# EAGLE board Qwiic_RF-Panel (EAGLE 7.7.0), part 1 of 2
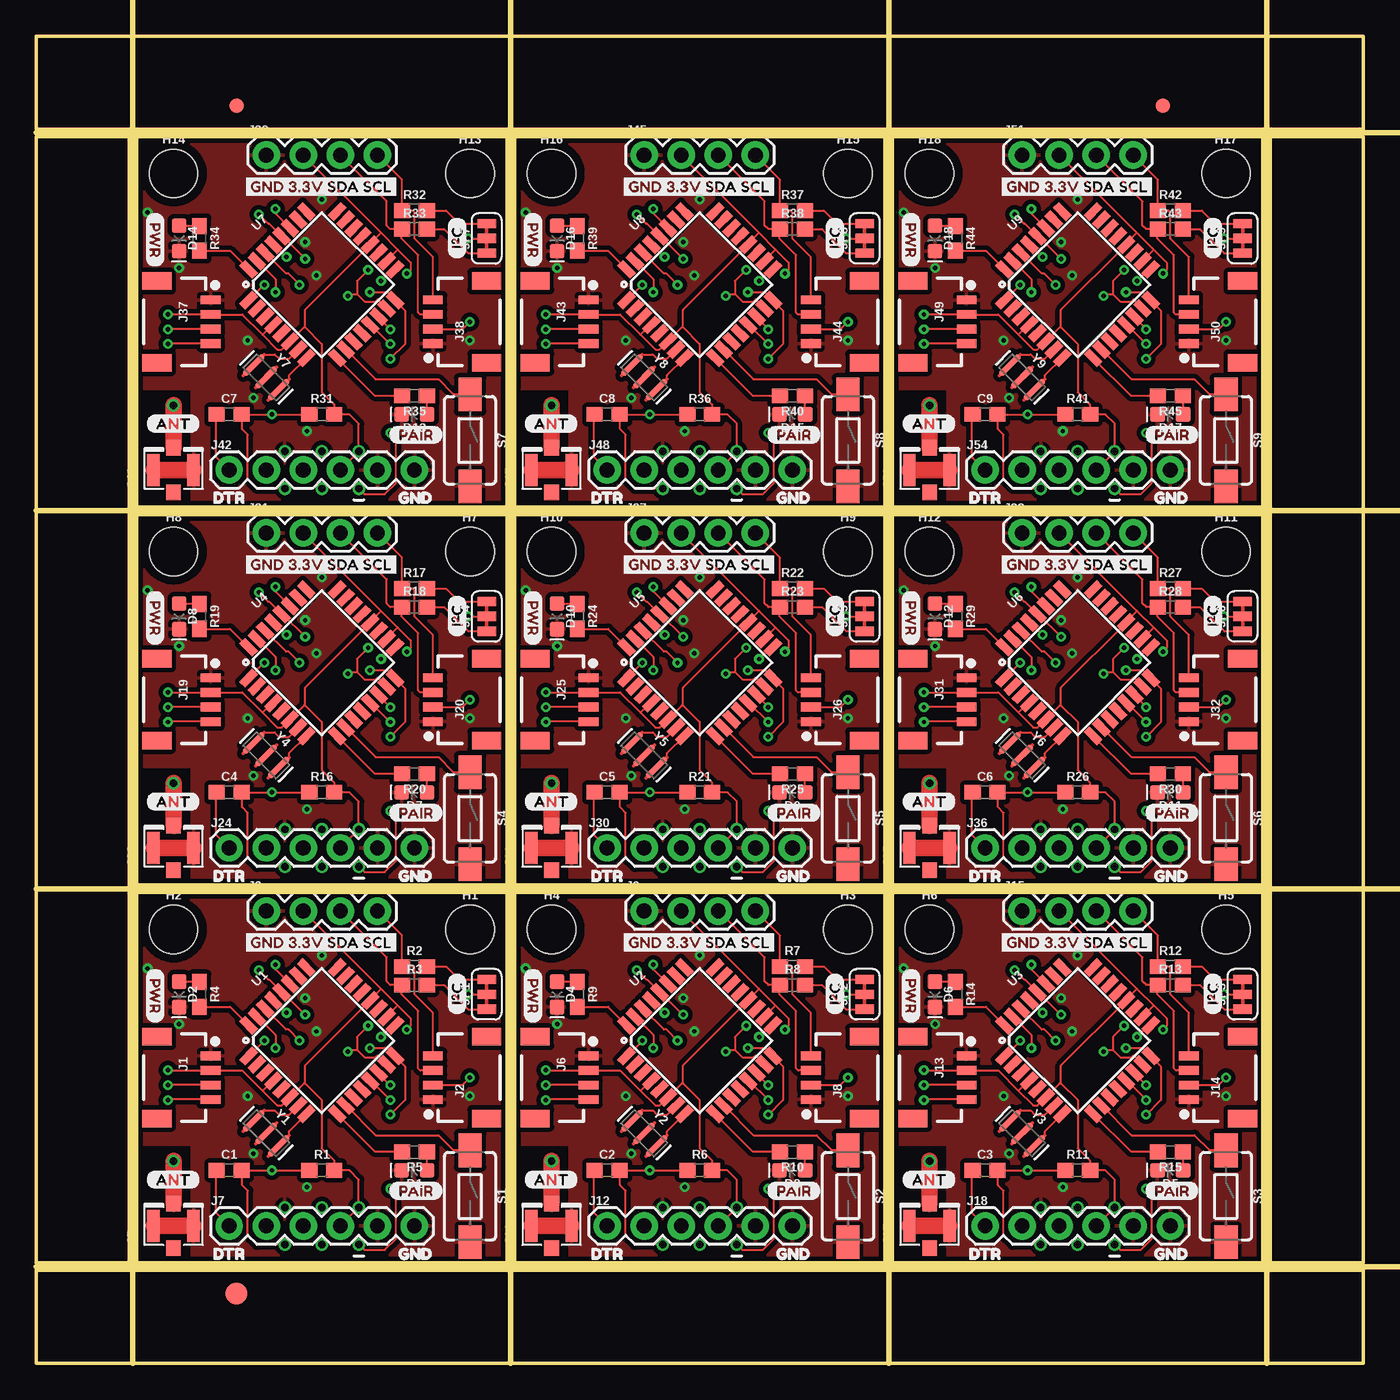
[diagram p0: board, top side]
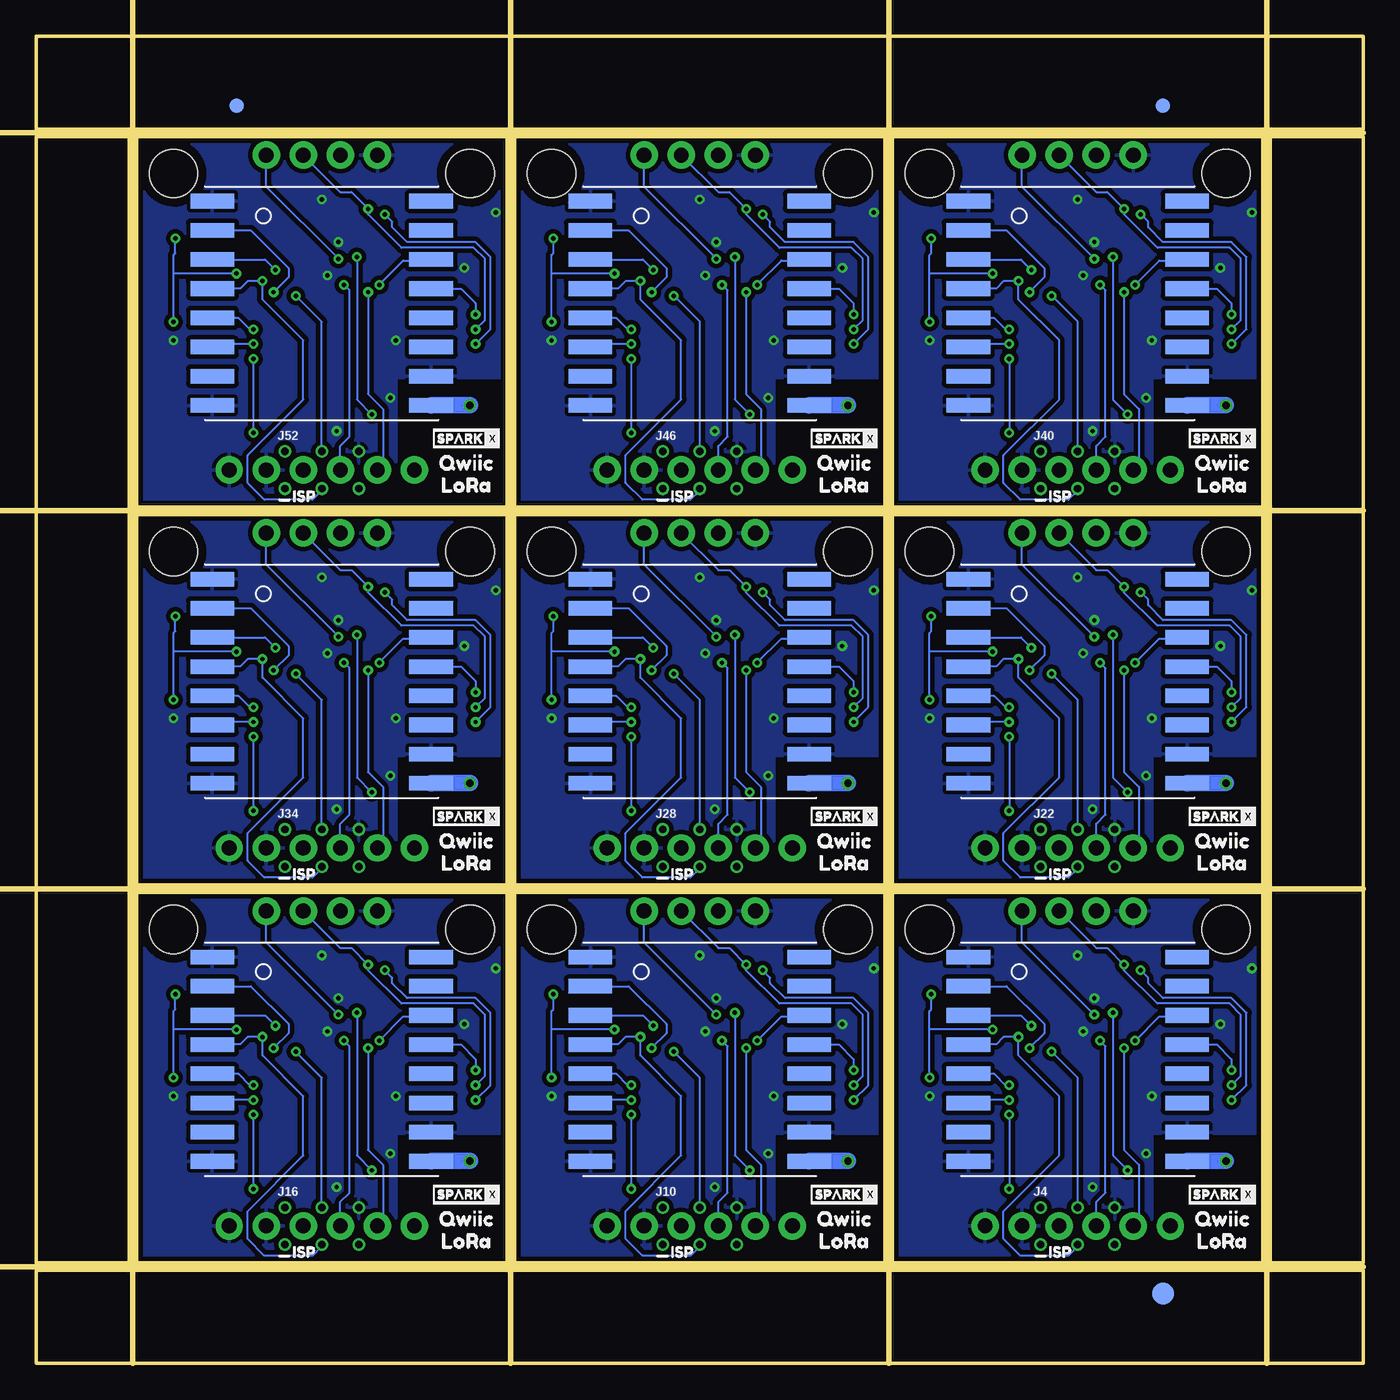
[diagram p1: board, bottom side, seen from below]

Size 90.93 x 90.93 mm. Coordinates in mm from the lower left corner, seen from the top.
Outline: 6.86,32.26 32.26,32.26 32.26,6.86 6.86,6.86 6.86,32.26
Outline: 32.77,32.26 58.17,32.26 58.17,6.86 32.77,6.86 32.77,32.26
Outline: 58.67,32.26 84.07,32.26 84.07,6.86 58.67,6.86 58.67,32.26
Outline: 6.86,58.17 32.26,58.17 32.26,32.77 6.86,32.77 6.86,58.17
Outline: 32.77,58.17 58.17,58.17 58.17,32.77 32.77,32.77 32.77,58.17
Outline: 58.67,58.17 84.07,58.17 84.07,32.77 58.67,32.77 58.67,58.17
Outline: 6.86,84.07 32.26,84.07 32.26,58.67 6.86,58.67 6.86,84.07
Outline: 32.77,84.07 58.17,84.07 58.17,58.67 32.77,58.67 32.77,84.07
Outline: 58.67,84.07 84.07,84.07 84.07,58.67 58.67,58.67 58.67,84.07
Outline: 0,6.35 90.93,6.35 90.93,0 0,0 0,6.35
Outline: 84.58,84.07 90.93,84.07 90.93,6.86 84.58,6.86 84.58,84.07
Outline: 0,90.93 90.93,90.93 90.93,84.58 0,84.58 0,90.93
Outline: 0,84.07 6.35,84.07 6.35,6.86 0,6.86 0,84.07
Copper layers (1*16): Top 0.035mm / dielectric 1.5mm / Bottom 0.035mm
Design rules "SparkFun-2-layer-PCBWay-LIMIT": minimum track width 6mil, minimum drill 0.3mm, track to track 6mil, track to pad 6mil, pad to pad 6mil, via to via 6mil, smd to smd 6mil, copper to edge 6mil, drill to drill 6mil, minimum pad ring 7mil, minimum via ring 7mil, stop-mask expansion 4mil, vias tented up to drill 25mil, thermal gap 10mil
Milling: 8 lines

## Footprints (pad centres in the part's own frame; a part is rotated, then mirrored left to right if it is on the bottom)
0603 = smd 1.1 x 1: 1 -0.85,0; 2 0.85,0
LED-0603 = smd 1 x 1: A -0.877,0; C 0.877,0
FIDUCIAL-1X2 = smd 1 x 1: 1 0,0
FIDUCIAL-1.5X3 = smd 1.5 x 1.5: 1 0,0
STAND-OFF = hole 3.302: 0,0
1X04_1MM_RA = smd 0.6 x 1.35: 1 -1.5,0; 2 -0.5,0; 3 0.5,0; 4 1.5,0 | smd 1.2 x 2: NC1 2.8,-3.675; NC2 -2.8,-3.675
1X04 = drill 1.016 pad 1.88: 1 0,0; 2 2.54,0; 3 5.08,0; 4 7.62,0
2X3_TEST_POINTS = drill 0.508: 1 -2.54,-1.27; 2 -2.54,1.27; 3 0,-1.27; 4 0,1.27; 5 2.54,-1.27; 6 2.54,1.27
U.FL = smd 2.2 x 0.85: 1 0,1.375; 2 0,-1.375 | smd 1.05 x 1: FEED 1.525,0; NC -1.525,0
1X06 = drill 1.016 pad 1.88: 1 0,0; 2 2.54,0; 3 5.08,0; 4 7.62,0; 5 10.16,0; 6 12.7,0
SMT-JUMPER_3_2-NC_TRACE_SILK = smd 0.635 x 1.27: 1 -1.016,0; 2 0,0; 3 1.016,0
RFM95/96/97/98W = smd 3 x 1: 3.3V 7.5,1; ANT 7.5,-7; DIO0 7.5,3; DIO1 7.5,5; DIO2 7.5,7; DIO3 7.5,-3; DIO4 7.5,-1; DIO5 -7.5,-5; GND@1 -7.5,7; GND@2 -7.5,-7; GND@3 7.5,-5; MISO -7.5,5; MOSI -7.5,3; NSS -7.5,-1; RESET -7.5,-3; SCK -7.5,1
TACTILE_SWITCH_SMD_6.0X3.5MM = smd 2.3 x 1.6: 1 -3.15,0; 2 3.15,0
TQFP32-08 = smd 1.27 x 0.559: 1 -4.293,2.8; 2 -4.293,2; 3 -4.293,1.2; 4 -4.293,0.4; 5 -4.293,-0.4; 6 -4.293,-1.2; 7 -4.293,-2; 8 -4.293,-2.8; 17 4.293,-2.8; 18 4.293,-2; 19 4.293,-1.2; 20 4.293,-0.4; 21 4.293,0.4; 22 4.293,1.2; 23 4.293,2; 24 4.293,2.8 | smd 0.559 x 1.27: 9 -2.8,-4.293; 10 -2,-4.293; 11 -1.2,-4.293; 12 -0.4,-4.293; 13 0.4,-4.293; 14 1.2,-4.293; 15 2,-4.293; 16 2.8,-4.293; 25 2.8,4.293; 26 2,4.293; 27 1.2,4.293; 28 0.4,4.293; 29 -0.4,4.293; 30 -1.2,4.293; 31 -2,4.293; 32 -2.8,4.293
RESONATOR-SMD-3.2X1.3 = smd 0.45 x 1.905: 1 -1.2,0; 2 0,0; 3 1.2,0

## Placement (x,y rotation side)
C1  0.1uF  [0603]  13.21,13.21 0 top
C2  0.1uF  [0603]  39.12,13.21 0 top
C3  0.1uF  [0603]  65.02,13.21 0 top
C4  0.1uF  [0603]  13.21,39.12 0 top
C5  0.1uF  [0603]  39.12,39.12 0 top
C6  0.1uF  [0603]  65.02,39.12 0 top
C7  0.1uF  [0603]  13.21,65.02 0 top
C8  0.1uF  [0603]  39.12,65.02 0 top
C9  0.1uF  [0603]  65.02,65.02 0 top
D1  BLUE  [LED-0603]  25.91,13.21 180 top
D2  RED  [LED-0603]  9.78,25.27 270 top
D3  BLUE  [LED-0603]  51.82,13.21 180 top
D4  RED  [LED-0603]  35.69,25.27 270 top
D5  BLUE  [LED-0603]  77.72,13.21 180 top
D6  RED  [LED-0603]  61.59,25.27 270 top
D7  BLUE  [LED-0603]  25.91,39.12 180 top
D8  RED  [LED-0603]  9.78,51.18 270 top
D9  BLUE  [LED-0603]  51.82,39.12 180 top
D10  RED  [LED-0603]  35.69,51.18 270 top
D11  BLUE  [LED-0603]  77.72,39.12 180 top
D12  RED  [LED-0603]  61.59,51.18 270 top
D13  BLUE  [LED-0603]  25.91,65.02 180 top
D14  RED  [LED-0603]  9.78,77.09 270 top
D15  BLUE  [LED-0603]  51.82,65.02 180 top
D16  RED  [LED-0603]  35.69,77.09 270 top
D17  BLUE  [LED-0603]  77.72,65.02 180 top
D18  RED  [LED-0603]  61.59,77.09 270 top
E$1  [FIDUCIAL-1X2]  13.72,86.17 0 top
E$2  [FIDUCIAL-1X2]  13.72,86.17 0 bottom
E$3  [FIDUCIAL-1X2]  77.22,86.17 0 top
E$4  [FIDUCIAL-1X2]  77.22,86.17 0 bottom
E$5  [FIDUCIAL-1.5X3]  13.72,4.76 0 top
E$6  [FIDUCIAL-1.5X3]  13.72,4.76 0 bottom
H1  STAND-OFF  [STAND-OFF]  29.72,29.72 0 top
H2  STAND-OFF  [STAND-OFF]  9.4,29.72 0 top
H3  STAND-OFF  [STAND-OFF]  55.63,29.72 0 top
H4  STAND-OFF  [STAND-OFF]  35.31,29.72 0 top
H5  STAND-OFF  [STAND-OFF]  81.53,29.72 0 top
H6  STAND-OFF  [STAND-OFF]  61.21,29.72 0 top
H7  STAND-OFF  [STAND-OFF]  29.72,55.63 0 top
H8  STAND-OFF  [STAND-OFF]  9.4,55.63 0 top
H9  STAND-OFF  [STAND-OFF]  55.63,55.63 0 top
H10  STAND-OFF  [STAND-OFF]  35.31,55.63 0 top
H11  STAND-OFF  [STAND-OFF]  81.53,55.63 0 top
H12  STAND-OFF  [STAND-OFF]  61.21,55.63 0 top
H13  STAND-OFF  [STAND-OFF]  29.72,81.53 0 top
H14  STAND-OFF  [STAND-OFF]  9.4,81.53 0 top
H15  STAND-OFF  [STAND-OFF]  55.63,81.53 0 top
H16  STAND-OFF  [STAND-OFF]  35.31,81.53 0 top
H17  STAND-OFF  [STAND-OFF]  81.53,81.53 0 top
H18  STAND-OFF  [STAND-OFF]  61.21,81.53 0 top
J1  Qwiic Right Angle  [1X04_1MM_RA]  11.94,19.56 270 top
J2  Qwiic Right Angle  [1X04_1MM_RA]  27.18,19.56 90 top
J3  [1X04]  15.75,30.99 0 top
J4  AVR_SPI_PROG_3X2TESTPOINTS  [2X3_TEST_POINTS]  19.56,9.4 0 bottom
J5  U.FL  [U.FL]  9.4,9.4 90 top
J6  Qwiic Right Angle  [1X04_1MM_RA]  37.85,19.56 270 top
J7  [1X06]  13.21,9.4 0 top
J8  Qwiic Right Angle  [1X04_1MM_RA]  53.09,19.56 90 top
J9  [1X04]  41.66,30.99 0 top
J10  AVR_SPI_PROG_3X2TESTPOINTS  [2X3_TEST_POINTS]  45.47,9.4 0 bottom
J11  U.FL  [U.FL]  35.31,9.4 90 top
J12  [1X06]  39.12,9.4 0 top
J13  Qwiic Right Angle  [1X04_1MM_RA]  63.75,19.56 270 top
J14  Qwiic Right Angle  [1X04_1MM_RA]  78.99,19.56 90 top
J15  [1X04]  67.56,30.99 0 top
J16  AVR_SPI_PROG_3X2TESTPOINTS  [2X3_TEST_POINTS]  71.37,9.4 0 bottom
J17  U.FL  [U.FL]  61.21,9.4 90 top
J18  [1X06]  65.02,9.4 0 top
J19  Qwiic Right Angle  [1X04_1MM_RA]  11.94,45.47 270 top
J20  Qwiic Right Angle  [1X04_1MM_RA]  27.18,45.47 90 top
J21  [1X04]  15.75,56.9 0 top
J22  AVR_SPI_PROG_3X2TESTPOINTS  [2X3_TEST_POINTS]  19.56,35.31 0 bottom
J23  U.FL  [U.FL]  9.4,35.31 90 top
J24  [1X06]  13.21,35.31 0 top
J25  Qwiic Right Angle  [1X04_1MM_RA]  37.85,45.47 270 top
J26  Qwiic Right Angle  [1X04_1MM_RA]  53.09,45.47 90 top
J27  [1X04]  41.66,56.9 0 top
J28  AVR_SPI_PROG_3X2TESTPOINTS  [2X3_TEST_POINTS]  45.47,35.31 0 bottom
J29  U.FL  [U.FL]  35.31,35.31 90 top
J30  [1X06]  39.12,35.31 0 top
J31  Qwiic Right Angle  [1X04_1MM_RA]  63.75,45.47 270 top
J32  Qwiic Right Angle  [1X04_1MM_RA]  78.99,45.47 90 top
J33  [1X04]  67.56,56.9 0 top
J34  AVR_SPI_PROG_3X2TESTPOINTS  [2X3_TEST_POINTS]  71.37,35.31 0 bottom
J35  U.FL  [U.FL]  61.21,35.31 90 top
J36  [1X06]  65.02,35.31 0 top
J37  Qwiic Right Angle  [1X04_1MM_RA]  11.94,71.37 270 top
J38  Qwiic Right Angle  [1X04_1MM_RA]  27.18,71.37 90 top
J39  [1X04]  15.75,82.8 0 top
J40  AVR_SPI_PROG_3X2TESTPOINTS  [2X3_TEST_POINTS]  19.56,61.21 0 bottom
J41  U.FL  [U.FL]  9.4,61.21 90 top
J42  [1X06]  13.21,61.21 0 top
J43  Qwiic Right Angle  [1X04_1MM_RA]  37.85,71.37 270 top
J44  Qwiic Right Angle  [1X04_1MM_RA]  53.09,71.37 90 top
J45  [1X04]  41.66,82.8 0 top
J46  AVR_SPI_PROG_3X2TESTPOINTS  [2X3_TEST_POINTS]  45.47,61.21 0 bottom
J47  U.FL  [U.FL]  35.31,61.21 90 top
J48  [1X06]  39.12,61.21 0 top
J49  Qwiic Right Angle  [1X04_1MM_RA]  63.75,71.37 270 top
J50  Qwiic Right Angle  [1X04_1MM_RA]  78.99,71.37 90 top
J51  [1X04]  67.56,82.8 0 top
J52  AVR_SPI_PROG_3X2TESTPOINTS  [2X3_TEST_POINTS]  71.37,61.21 0 bottom
J53  U.FL  [U.FL]  61.21,61.21 90 top
J54  [1X06]  65.02,61.21 0 top
JP1  [SMT-JUMPER_3_2-NC_TRACE_SILK]  30.86,25.27 90 top
JP2  [SMT-JUMPER_3_2-NC_TRACE_SILK]  56.77,25.27 90 top
JP3  [SMT-JUMPER_3_2-NC_TRACE_SILK]  82.68,25.27 90 top
JP4  [SMT-JUMPER_3_2-NC_TRACE_SILK]  30.86,51.18 90 top
JP5  [SMT-JUMPER_3_2-NC_TRACE_SILK]  56.77,51.18 90 top
JP6  [SMT-JUMPER_3_2-NC_TRACE_SILK]  82.68,51.18 90 top
JP7  [SMT-JUMPER_3_2-NC_TRACE_SILK]  30.86,77.09 90 top
JP8  [SMT-JUMPER_3_2-NC_TRACE_SILK]  56.77,77.09 90 top
JP9  [SMT-JUMPER_3_2-NC_TRACE_SILK]  82.68,77.09 90 top
R1  10k  [0603]  19.56,13.21 0 top
R2  2.2k  [0603]  25.91,27.18 0 top
R3  2.2k  [0603]  25.91,25.91 0 top
R4  1k  [0603]  11.18,25.27 270 top
R5  1k  [0603]  25.91,14.48 180 top
R6  10k  [0603]  45.47,13.21 0 top
R7  2.2k  [0603]  51.82,27.18 0 top
R8  2.2k  [0603]  51.82,25.91 0 top
R9  1k  [0603]  37.08,25.27 270 top
R10  1k  [0603]  51.82,14.48 180 top
R11  10k  [0603]  71.37,13.21 0 top
R12  2.2k  [0603]  77.72,27.18 0 top
R13  2.2k  [0603]  77.72,25.91 0 top
R14  1k  [0603]  62.99,25.27 270 top
R15  1k  [0603]  77.72,14.48 180 top
R16  10k  [0603]  19.56,39.12 0 top
R17  2.2k  [0603]  25.91,53.09 0 top
R18  2.2k  [0603]  25.91,51.82 0 top
R19  1k  [0603]  11.18,51.18 270 top
R20  1k  [0603]  25.91,40.39 180 top
R21  10k  [0603]  45.47,39.12 0 top
R22  2.2k  [0603]  51.82,53.09 0 top
R23  2.2k  [0603]  51.82,51.82 0 top
R24  1k  [0603]  37.08,51.18 270 top
R25  1k  [0603]  51.82,40.39 180 top
R26  10k  [0603]  71.37,39.12 0 top
R27  2.2k  [0603]  77.72,53.09 0 top
R28  2.2k  [0603]  77.72,51.82 0 top
R29  1k  [0603]  62.99,51.18 270 top
R30  1k  [0603]  77.72,40.39 180 top
R31  10k  [0603]  19.56,65.02 0 top
R32  2.2k  [0603]  25.91,78.99 0 top
R33  2.2k  [0603]  25.91,77.72 0 top
R34  1k  [0603]  11.18,77.09 270 top
R35  1k  [0603]  25.91,66.29 180 top
R36  10k  [0603]  45.47,65.02 0 top
R37  2.2k  [0603]  51.82,78.99 0 top
R38  2.2k  [0603]  51.82,77.72 0 top
R39  1k  [0603]  37.08,77.09 270 top
R40  1k  [0603]  51.82,66.29 180 top
R41  10k  [0603]  71.37,65.02 0 top
R42  2.2k  [0603]  77.72,78.99 0 top
R43  2.2k  [0603]  77.72,77.72 0 top
R44  1k  [0603]  62.99,77.09 270 top
R45  1k  [0603]  77.72,66.29 180 top
RFM96W  RFM96W  [RFM95/96/97/98W]  19.56,20.83 0 bottom
RFM96W1  RFM96W  [RFM95/96/97/98W]  45.47,20.83 0 bottom
RFM96W2  RFM96W  [RFM95/96/97/98W]  71.37,20.83 0 bottom
RFM96W3  RFM96W  [RFM95/96/97/98W]  19.56,46.74 0 bottom
RFM96W4  RFM96W  [RFM95/96/97/98W]  45.47,46.74 0 bottom
RFM96W5  RFM96W  [RFM95/96/97/98W]  71.37,46.74 0 bottom
RFM96W6  RFM96W  [RFM95/96/97/98W]  19.56,72.64 0 bottom
RFM96W7  RFM96W  [RFM95/96/97/98W]  45.47,72.64 0 bottom
RFM96W8  RFM96W  [RFM95/96/97/98W]  71.37,72.64 0 bottom
S1  6.0X3.5MM  [TACTILE_SWITCH_SMD_6.0X3.5MM]  29.72,11.43 270 top
S2  6.0X3.5MM  [TACTILE_SWITCH_SMD_6.0X3.5MM]  55.63,11.43 270 top
S3  6.0X3.5MM  [TACTILE_SWITCH_SMD_6.0X3.5MM]  81.53,11.43 270 top
S4  6.0X3.5MM  [TACTILE_SWITCH_SMD_6.0X3.5MM]  29.72,37.34 270 top
S5  6.0X3.5MM  [TACTILE_SWITCH_SMD_6.0X3.5MM]  55.63,37.34 270 top
S6  6.0X3.5MM  [TACTILE_SWITCH_SMD_6.0X3.5MM]  81.53,37.34 270 top
S7  6.0X3.5MM  [TACTILE_SWITCH_SMD_6.0X3.5MM]  29.72,63.25 270 top
S8  6.0X3.5MM  [TACTILE_SWITCH_SMD_6.0X3.5MM]  55.63,63.25 270 top
S9  6.0X3.5MM  [TACTILE_SWITCH_SMD_6.0X3.5MM]  81.53,63.25 270 top
U1  ATMEGA328P_TQFP  [TQFP32-08]  19.56,22.1 45 top
U2  ATMEGA328P_TQFP  [TQFP32-08]  45.47,22.1 45 top
U3  ATMEGA328P_TQFP  [TQFP32-08]  71.37,22.1 45 top
U4  ATMEGA328P_TQFP  [TQFP32-08]  19.56,48.01 45 top
U5  ATMEGA328P_TQFP  [TQFP32-08]  45.47,48.01 45 top
U6  ATMEGA328P_TQFP  [TQFP32-08]  71.37,48.01 45 top
U7  ATMEGA328P_TQFP  [TQFP32-08]  19.56,73.91 45 top
U8  ATMEGA328P_TQFP  [TQFP32-08]  45.47,73.91 45 top
U9  ATMEGA328P_TQFP  [TQFP32-08]  71.37,73.91 45 top
U$1  [ANT5]  7.49,12.57 0 top
U$2  [DTR3]  11.43,7.49 0 top
U$3  [GND4]  24.13,7.49 0 top
U$4  [GND_3#3V_SDA_SCL6]  13.97,28.83 0 top
U$5  [I#C2]  28.83,23.88 90 top
U$6  [PAIR1]  24.13,11.81 0 top
U$7  [PWR0]  8.13,27.05 270 top
U$8  [SPARKX-TINY]  9.65,11.56 0 bottom
U$9  [QWIIC0]  12.45,9.91 0 bottom
U$10  [LORA1]  12.32,8.38 0 bottom
U$11  [ISP0]  22.23,7.62 0 bottom
U$12  [ANT5]  33.4,12.57 0 top
U$13  [DTR3]  37.34,7.49 0 top
U$14  [GND4]  50.04,7.49 0 top
U$15  [GND_3#3V_SDA_SCL6]  39.88,28.83 0 top
U$16  [I#C2]  54.74,23.88 90 top
U$17  [PAIR1]  50.04,11.81 0 top
U$18  [PWR0]  34.04,27.05 270 top
U$19  [SPARKX-TINY]  35.56,11.56 0 bottom
U$20  [QWIIC0]  38.35,9.91 0 bottom
U$21  [LORA1]  38.23,8.38 0 bottom
U$22  [ISP0]  48.13,7.62 0 bottom
U$23  [ANT5]  59.31,12.57 0 top
U$24  [DTR3]  63.25,7.49 0 top
U$25  [GND4]  75.95,7.49 0 top
U$26  [GND_3#3V_SDA_SCL6]  65.79,28.83 0 top
U$27  [I#C2]  80.65,23.88 90 top
U$28  [PAIR1]  75.95,11.81 0 top
U$29  [PWR0]  59.94,27.05 270 top
U$30  [SPARKX-TINY]  61.47,11.56 0 bottom
U$31  [QWIIC0]  64.26,9.91 0 bottom
U$32  [LORA1]  64.14,8.38 0 bottom
U$33  [ISP0]  74.04,7.62 0 bottom
U$34  [ANT5]  7.49,38.48 0 top
U$35  [DTR3]  11.43,33.4 0 top
U$36  [GND4]  24.13,33.4 0 top
U$37  [GND_3#3V_SDA_SCL6]  13.97,54.74 0 top
U$38  [I#C2]  28.83,49.78 90 top
U$39  [PAIR1]  24.13,37.72 0 top
U$40  [PWR0]  8.13,52.96 270 top
U$41  [SPARKX-TINY]  9.65,37.46 0 bottom
U$42  [QWIIC0]  12.45,35.81 0 bottom
U$43  [LORA1]  12.32,34.29 0 bottom
U$44  [ISP0]  22.23,33.53 0 bottom
U$45  [ANT5]  33.4,38.48 0 top
U$46  [DTR3]  37.34,33.4 0 top
U$47  [GND4]  50.04,33.4 0 top
U$48  [GND_3#3V_SDA_SCL6]  39.88,54.74 0 top
U$49  [I#C2]  54.74,49.78 90 top
U$50  [PAIR1]  50.04,37.72 0 top
U$51  [PWR0]  34.04,52.96 270 top
U$52  [SPARKX-TINY]  35.56,37.46 0 bottom
U$53  [QWIIC0]  38.35,35.81 0 bottom
U$54  [LORA1]  38.23,34.29 0 bottom
U$55  [ISP0]  48.13,33.53 0 bottom
U$56  [ANT5]  59.31,38.48 0 top
U$57  [DTR3]  63.25,33.4 0 top
U$58  [GND4]  75.95,33.4 0 top
U$59  [GND_3#3V_SDA_SCL6]  65.79,54.74 0 top
U$60  [I#C2]  80.65,49.78 90 top
U$61  [PAIR1]  75.95,37.72 0 top
U$62  [PWR0]  59.94,52.96 270 top
U$63  [SPARKX-TINY]  61.47,37.46 0 bottom
U$64  [QWIIC0]  64.26,35.81 0 bottom
U$65  [LORA1]  64.14,34.29 0 bottom
U$66  [ISP0]  74.04,33.53 0 bottom
U$67  [ANT5]  7.49,64.39 0 top
U$68  [DTR3]  11.43,59.31 0 top
U$69  [GND4]  24.13,59.31 0 top
U$70  [GND_3#3V_SDA_SCL6]  13.97,80.65 0 top
U$71  [I#C2]  28.83,75.69 90 top
U$72  [PAIR1]  24.13,63.63 0 top
U$73  [PWR0]  8.13,78.87 270 top
U$74  [SPARKX-TINY]  9.65,63.37 0 bottom
U$75  [QWIIC0]  12.45,61.72 0 bottom
U$76  [LORA1]  12.32,60.2 0 bottom
U$77  [ISP0]  22.23,59.44 0 bottom
U$78  [ANT5]  33.4,64.39 0 top
U$79  [DTR3]  37.34,59.31 0 top
U$80  [GND4]  50.04,59.31 0 top
U$81  [GND_3#3V_SDA_SCL6]  39.88,80.65 0 top
U$82  [I#C2]  54.74,75.69 90 top
U$83  [PAIR1]  50.04,63.63 0 top
U$84  [PWR0]  34.04,78.87 270 top
U$85  [SPARKX-TINY]  35.56,63.37 0 bottom
U$86  [QWIIC0]  38.35,61.72 0 bottom
U$87  [LORA1]  38.23,60.2 0 bottom
U$88  [ISP0]  48.13,59.44 0 bottom
U$89  [ANT5]  59.31,64.39 0 top
U$90  [DTR3]  63.25,59.31 0 top
U$91  [GND4]  75.95,59.31 0 top
U$92  [GND_3#3V_SDA_SCL6]  65.79,80.65 0 top
U$93  [I#C2]  80.65,75.69 90 top
U$94  [PAIR1]  75.95,63.63 0 top
U$95  [PWR0]  59.94,78.87 270 top
U$96  [SPARKX-TINY]  61.47,63.37 0 bottom
U$97  [QWIIC0]  64.26,61.72 0 bottom
U$98  [LORA1]  64.14,60.2 0 bottom
U$99  [ISP0]  74.04,59.44 0 bottom
Y1  16MHz  [RESONATOR-SMD-3.2X1.3]  15.75,15.75 315 top
Y2  16MHz  [RESONATOR-SMD-3.2X1.3]  41.66,15.75 315 top
Y3  16MHz  [RESONATOR-SMD-3.2X1.3]  67.56,15.75 315 top
Y4  16MHz  [RESONATOR-SMD-3.2X1.3]  15.75,41.66 315 top
Y5  16MHz  [RESONATOR-SMD-3.2X1.3]  41.66,41.66 315 top
Y6  16MHz  [RESONATOR-SMD-3.2X1.3]  67.56,41.66 315 top
Y7  16MHz  [RESONATOR-SMD-3.2X1.3]  15.75,67.56 315 top
Y8  16MHz  [RESONATOR-SMD-3.2X1.3]  41.66,67.56 315 top
Y9  16MHz  [RESONATOR-SMD-3.2X1.3]  67.56,67.56 315 top

## Library data of the parts
C1-C9 = SparkFun-Capacitors; PROD_ID: CAP-00810
D1 D3 D5 D7 D9 D11 D13 D15 D17 = SparkFun-LED; PROD_ID: DIO-08575
D2 D4 D6 D8 D10 D12 D14 D16 D18 = SparkFun-LED; PROD_ID: DIO-00819
E$1-E$4 = SparkFun-Aesthetics
E$5 E$6 = SparkFun-Retired
H1-H18 = SparkFun-Hardware
J1 J2 J6 J8 J13 J14 J19 J20 J25 J26 J31 J32 J37 J38 J43 J44 J49 J50 = SparkFun-Connectors; PROD_ID: CONN-13694
J3 J4 J7 J9 J10 J12 J15 J16 J18 J21 J22 J24 J27 J28 J30 J33 J34 J36 J39 J40 J42 J45 J46 J48 J51 J52 J54 = SparkFun-Connectors
J5 J11 J17 J23 J29 J35 J41 J47 J53 = SparkFun-Connectors; PROD_ID: CONN-09193; SF_ID: WRL-09144
JP1-JP9 = SparkFun-Jumpers
R1 R6 R11 R16 R21 R26 R31 R36 R41 = SparkFun-Resistors; PROD_ID: RES-00824
R2 R3 R7 R8 R12 R13 R17 R18 R22 R23 R27 R28 R32 R33 R37 R38 R42 R43 = SparkFun-Resistors; PROD_ID: RES-08272
R4 R5 R9 R10 R14 R15 R19 R20 R24 R25 R29 R30 R34 R35 R39 R40 R44 R45 = SparkFun-Resistors; PROD_ID: RES-07856
RFM96W RFM96W1-RFM96W8 U$8 U$19 U$30 U$41 U$52 U$63 U$74 U$85 U$96 = SparkX
S1-S9 = SparkFun-Switches; PROD_ID: SWCH-00815; SF_SKU: COM-08229
U1-U9 = SparkFun-IC-Microcontroller; PROD_ID: IC-09069
U$1-U$7 U$12-U$18 U$23-U$29 U$34-U$40 U$45-U$51 U$56-U$62 U$67-U$73 U$78-U$84 U$89-U$95 = buzzard_labels (13)
U$9 U$10 U$20 U$21 U$31 U$32 U$42 U$43 U$53 U$54 U$64 U$65 U$75 U$76 U$86 U$87 U$97 U$98 = buzzard_labels (16)
U$11 U$22 U$33 U$44 U$55 U$66 U$77 U$88 U$99 = buzzard_labels (17)
Y1-Y9 = SparkFun-Clocks; PROD_ID: XTAL-08900

## Nets
3.3V: J1.2 J2.2 J3.2 J4.2 J7.4 JP1.2 R1.2 RFM96W.3.3V U1.4 U1.6 U1.18 U1.20
3.3V1: J6.2 J8.2 J9.2 J10.2 J12.4 JP2.2 R6.2 RFM96W1.3.3V U2.4 U2.6 U2.18 U2.20
3.3V2: J13.2 J14.2 J15.2 J16.2 J18.4 JP3.2 R11.2 RFM96W2.3.3V U3.4 U3.6 U3.18 U3.20
3.3V3: J19.2 J20.2 J21.2 J22.2 J24.4 JP4.2 R16.2 RFM96W3.3.3V U4.4 U4.6 U4.18 U4.20
3.3V4: J25.2 J26.2 J27.2 J28.2 J30.4 JP5.2 R21.2 RFM96W4.3.3V U5.4 U5.6 U5.18 U5.20
3.3V5: J31.2 J32.2 J33.2 J34.2 J36.4 JP6.2 R26.2 RFM96W5.3.3V U6.4 U6.6 U6.18 U6.20
3.3V6: J37.2 J38.2 J39.2 J40.2 J42.4 JP7.2 R31.2 RFM96W6.3.3V U7.4 U7.6 U7.18 U7.20
3.3V7: J43.2 J44.2 J45.2 J46.2 J48.4 JP8.2 R36.2 RFM96W7.3.3V U8.4 U8.6 U8.18 U8.20
3.3V8: J49.2 J50.2 J51.2 J52.2 J54.4 JP9.2 R41.2 RFM96W8.3.3V U9.4 U9.6 U9.18 U9.20
ANT: J5.FEED RFM96W.ANT
ANT1: J11.FEED RFM96W1.ANT
ANT2: J17.FEED RFM96W2.ANT
ANT3: J23.FEED RFM96W3.ANT
ANT4: J29.FEED RFM96W4.ANT
ANT5: J35.FEED RFM96W5.ANT
ANT6: J41.FEED RFM96W6.ANT
ANT7: J47.FEED RFM96W7.ANT
ANT8: J53.FEED RFM96W8.ANT
DTR: C1.1 J7.1
DTR1: C2.1 J12.1
DTR2: C3.1 J18.1
DTR3: C4.1 J24.1
DTR4: C5.1 J30.1
DTR5: C6.1 J36.1
DTR6: C7.1 J42.1
DTR7: C8.1 J48.1
DTR8: C9.1 J54.1
GND: D1.C D2.C J1.1 J2.1 J3.1 J4.6 J5.1 J5.2 J7.5 J7.6 RFM96W.GND@1 RFM96W.GND@2 RFM96W.GND@3 S1.2 U1.3 U1.5 U1.21 Y1.2
GND1: D3.C D4.C J6.1 J8.1 J9.1 J10.6 J11.1 J11.2 J12.5 J12.6 RFM96W1.GND@1 RFM96W1.GND@2 RFM96W1.GND@3 S2.2 U2.3 U2.5 U2.21 Y2.2
GND2: D5.C D6.C J13.1 J14.1 J15.1 J16.6 J17.1 J17.2 J18.5 J18.6 RFM96W2.GND@1 RFM96W2.GND@2 RFM96W2.GND@3 S3.2 U3.3 U3.5 U3.21 Y3.2
GND3: D7.C D8.C J19.1 J20.1 J21.1 J22.6 J23.1 J23.2 J24.5 J24.6 RFM96W3.GND@1 RFM96W3.GND@2 RFM96W3.GND@3 S4.2 U4.3 U4.5 U4.21 Y4.2
GND4: D9.C D10.C J25.1 J26.1 J27.1 J28.6 J29.1 J29.2 J30.5 J30.6 RFM96W4.GND@1 RFM96W4.GND@2 RFM96W4.GND@3 S5.2 U5.3 U5.5 U5.21 Y5.2
GND5: D11.C D12.C J31.1 J32.1 J33.1 J34.6 J35.1 J35.2 J36.5 J36.6 RFM96W5.GND@1 RFM96W5.GND@2 RFM96W5.GND@3 S6.2 U6.3 U6.5 U6.21 Y6.2
GND6: D13.C D14.C J37.1 J38.1 J39.1 J40.6 J41.1 J41.2 J42.5 J42.6 RFM96W6.GND@1 RFM96W6.GND@2 RFM96W6.GND@3 S7.2 U7.3 U7.5 U7.21 Y7.2
GND7: D15.C D16.C J43.1 J44.1 J45.1 J46.6 J47.1 J47.2 J48.5 J48.6 RFM96W7.GND@1 RFM96W7.GND@2 RFM96W7.GND@3 S8.2 U8.3 U8.5 U8.21 Y8.2
GND8: D17.C D18.C J49.1 J50.1 J51.1 J52.6 J53.1 J53.2 J54.5 J54.6 RFM96W8.GND@1 RFM96W8.GND@2 RFM96W8.GND@3 S9.2 U9.3 U9.5 U9.21 Y9.2
MISO: J4.1 RFM96W.MISO U1.16
MISO1: J10.1 RFM96W1.MISO U2.16
MISO2: J16.1 RFM96W2.MISO U3.16
MISO3: J22.1 RFM96W3.MISO U4.16
MISO4: J28.1 RFM96W4.MISO U5.16
MISO5: J34.1 RFM96W5.MISO U6.16
MISO6: J40.1 RFM96W6.MISO U7.16
MISO7: J46.1 RFM96W7.MISO U8.16
MISO8: J52.1 RFM96W8.MISO U9.16
MOSI: J4.4 RFM96W.MOSI U1.15
MOSI1: J10.4 RFM96W1.MOSI U2.15
MOSI2: J16.4 RFM96W2.MOSI U3.15
MOSI3: J22.4 RFM96W3.MOSI U4.15
MOSI4: J28.4 RFM96W4.MOSI U5.15
MOSI5: J34.4 RFM96W5.MOSI U6.15
MOSI6: J40.4 RFM96W6.MOSI U7.15
MOSI7: J46.4 RFM96W7.MOSI U8.15
MOSI8: J52.4 RFM96W8.MOSI U9.15
N$1: D2.A R4.1
N$2: D1.A R5.1
N$3: U2.7 Y2.1
N$4: U1.7 Y1.1
N$5: U1.8 Y1.3
N$6: U2.8 Y2.3
N$7: JP1.1 R3.2
N$8: JP1.3 R2.2
N$9: JP2.1 R8.2
N$10: JP2.3 R7.2
N$11: D4.A R9.1
N$12: D3.A R10.1
N$13: U3.7 Y3.1
N$14: U3.8 Y3.3
N$15: JP3.1 R13.2
N$16: JP3.3 R12.2
N$17: D6.A R14.1
N$18: D5.A R15.1
N$19: U4.7 Y4.1
N$20: U4.8 Y4.3
N$21: JP4.1 R18.2
N$22: JP4.3 R17.2
N$23: D8.A R19.1
N$24: D7.A R20.1
N$25: U5.7 Y5.1
N$26: U5.8 Y5.3
N$27: JP5.1 R23.2
N$28: JP5.3 R22.2
N$29: D10.A R24.1
N$30: D9.A R25.1
N$31: U6.7 Y6.1
N$32: U6.8 Y6.3
N$33: JP6.1 R28.2
N$34: JP6.3 R27.2
N$35: D12.A R29.1
N$36: D11.A R30.1
N$37: U7.7 Y7.1
N$38: U7.8 Y7.3
N$39: JP7.1 R33.2
N$40: JP7.3 R32.2
N$41: D14.A R34.1
N$42: D13.A R35.1
N$43: U8.7 Y8.1
N$44: U8.8 Y8.3
N$45: JP8.1 R38.2
N$46: JP8.3 R37.2
N$47: D16.A R39.1
N$48: D15.A R40.1
N$49: U9.7 Y9.1
N$50: U9.8 Y9.3
N$51: JP9.1 R43.2
N$52: JP9.3 R42.2
N$53: D18.A R44.1
N$54: D17.A R45.1
PAIR_BTN: S1.1 U1.10
PAIR_BTN1: S2.1 U2.10
PAIR_BTN2: S3.1 U3.10
PAIR_BTN3: S4.1 U4.10
PAIR_BTN4: S5.1 U5.10
PAIR_BTN5: S6.1 U6.10
PAIR_BTN6: S7.1 U7.10
PAIR_BTN7: S8.1 U8.10
PAIR_BTN8: S9.1 U9.10
PAIR_LED: R5.2 U1.9
PAIR_LED1: R10.2 U2.9
PAIR_LED2: R15.2 U3.9
PAIR_LED3: R20.2 U4.9
PAIR_LED4: R25.2 U5.9
PAIR_LED5: R30.2 U6.9
PAIR_LED6: R35.2 U7.9
PAIR_LED7: R40.2 U8.9
PAIR_LED8: R45.2 U9.9
PWR_LED: R4.2 U1.32
PWR_LED1: R9.2 U2.32
PWR_LED2: R14.2 U3.32
PWR_LED3: R19.2 U4.32
PWR_LED4: R24.2 U5.32
PWR_LED5: R29.2 U6.32
PWR_LED6: R34.2 U7.32
PWR_LED7: R39.2 U8.32
PWR_LED8: R44.2 U9.32
RFM_CS: RFM96W.NSS U1.14
RFM_CS1: RFM96W1.NSS U2.14
RFM_CS2: RFM96W2.NSS U3.14
RFM_CS3: RFM96W3.NSS U4.14
RFM_CS4: RFM96W4.NSS U5.14
RFM_CS5: RFM96W5.NSS U6.14
RFM_CS6: RFM96W6.NSS U7.14
RFM_CS7: RFM96W7.NSS U8.14
RFM_CS8: RFM96W8.NSS U9.14
RFM_INT: RFM96W.DIO0 U1.1
RFM_INT1: RFM96W1.DIO0 U2.1
RFM_INT2: RFM96W2.DIO0 U3.1
RFM_INT3: RFM96W3.DIO0 U4.1
RFM_INT4: RFM96W4.DIO0 U5.1
RFM_INT5: RFM96W5.DIO0 U6.1
RFM_INT6: RFM96W6.DIO0 U7.1
RFM_INT7: RFM96W7.DIO0 U8.1
RFM_INT8: RFM96W8.DIO0 U9.1
RFM_RST: RFM96W.RESET U1.13
RFM_RST1: RFM96W1.RESET U2.13
RFM_RST2: RFM96W2.RESET U3.13
RFM_RST3: RFM96W3.RESET U4.13
RFM_RST4: RFM96W4.RESET U5.13
RFM_RST5: RFM96W5.RESET U6.13
RFM_RST6: RFM96W6.RESET U7.13
RFM_RST7: RFM96W7.RESET U8.13
RFM_RST8: RFM96W8.RESET U9.13
RST: C1.2 J4.5 R1.1 U1.29
RST1: C2.2 J10.5 R6.1 U2.29
RST2: C3.2 J16.5 R11.1 U3.29
RST3: C4.2 J22.5 R16.1 U4.29
RST4: C5.2 J28.5 R21.1 U5.29
RST5: C6.2 J34.5 R26.1 U6.29
RST6: C7.2 J40.5 R31.1 U7.29
RST7: C8.2 J46.5 R36.1 U8.29
RST8: C9.2 J52.5 R41.1 U9.29
RXI: J7.3 U1.30
RXI1: J12.3 U2.30
RXI2: J18.3 U3.30
RXI3: J24.3 U4.30
RXI4: J30.3 U5.30
RXI5: J36.3 U6.30
RXI6: J42.3 U7.30
RXI7: J48.3 U8.30
RXI8: J54.3 U9.30
SCK: J4.3 RFM96W.SCK U1.17
SCK1: J10.3 RFM96W1.SCK U2.17
SCK2: J16.3 RFM96W2.SCK U3.17
SCK3: J22.3 RFM96W3.SCK U4.17
SCK4: J28.3 RFM96W4.SCK U5.17
SCK5: J34.3 RFM96W5.SCK U6.17
SCK6: J40.3 RFM96W6.SCK U7.17
SCK7: J46.3 RFM96W7.SCK U8.17
SCK8: J52.3 RFM96W8.SCK U9.17
SCL: J1.4 J2.4 J3.4 R2.1 U1.28
SCL1: J6.4 J8.4 J9.4 R7.1 U2.28
SCL2: J13.4 J14.4 J15.4 R12.1 U3.28
SCL3: J19.4 J20.4 J21.4 R17.1 U4.28
SCL4: J25.4 J26.4 J27.4 R22.1 U5.28
SCL5: J31.4 J32.4 J33.4 R27.1 U6.28
SCL6: J37.4 J38.4 J39.4 R32.1 U7.28
SCL7: J43.4 J44.4 J45.4 R37.1 U8.28
SCL8: J49.4 J50.4 J51.4 R42.1 U9.28
SDA: J1.3 J2.3 J3.3 R3.1 U1.27
SDA1: J6.3 J8.3 J9.3 R8.1 U2.27
SDA2: J13.3 J14.3 J15.3 R13.1 U3.27
SDA3: J19.3 J20.3 J21.3 R18.1 U4.27
SDA4: J25.3 J26.3 J27.3 R23.1 U5.27
SDA5: J31.3 J32.3 J33.3 R28.1 U6.27
SDA6: J37.3 J38.3 J39.3 R33.1 U7.27
SDA7: J43.3 J44.3 J45.3 R38.1 U8.27
SDA8: J49.3 J50.3 J51.3 R43.1 U9.27
TXO: J7.2 U1.31
TXO1: J12.2 U2.31
TXO2: J18.2 U3.31
TXO3: J24.2 U4.31
TXO4: J30.2 U5.31
TXO5: J36.2 U6.31
TXO6: J42.2 U7.31
TXO7: J48.2 U8.31
TXO8: J54.2 U9.31